# Altium PCB Hierogram_V2.1.PcbDoc
Units mil, origin at the board's own origin, x right, y up, seen from the top; angles counter-clockwise.
Board outline 2850.39 x 3346.46 mil, 2 copper layers (Top Layer, Bottom Layer); 50 components, 102 nets, 230 pads, 32 vias.
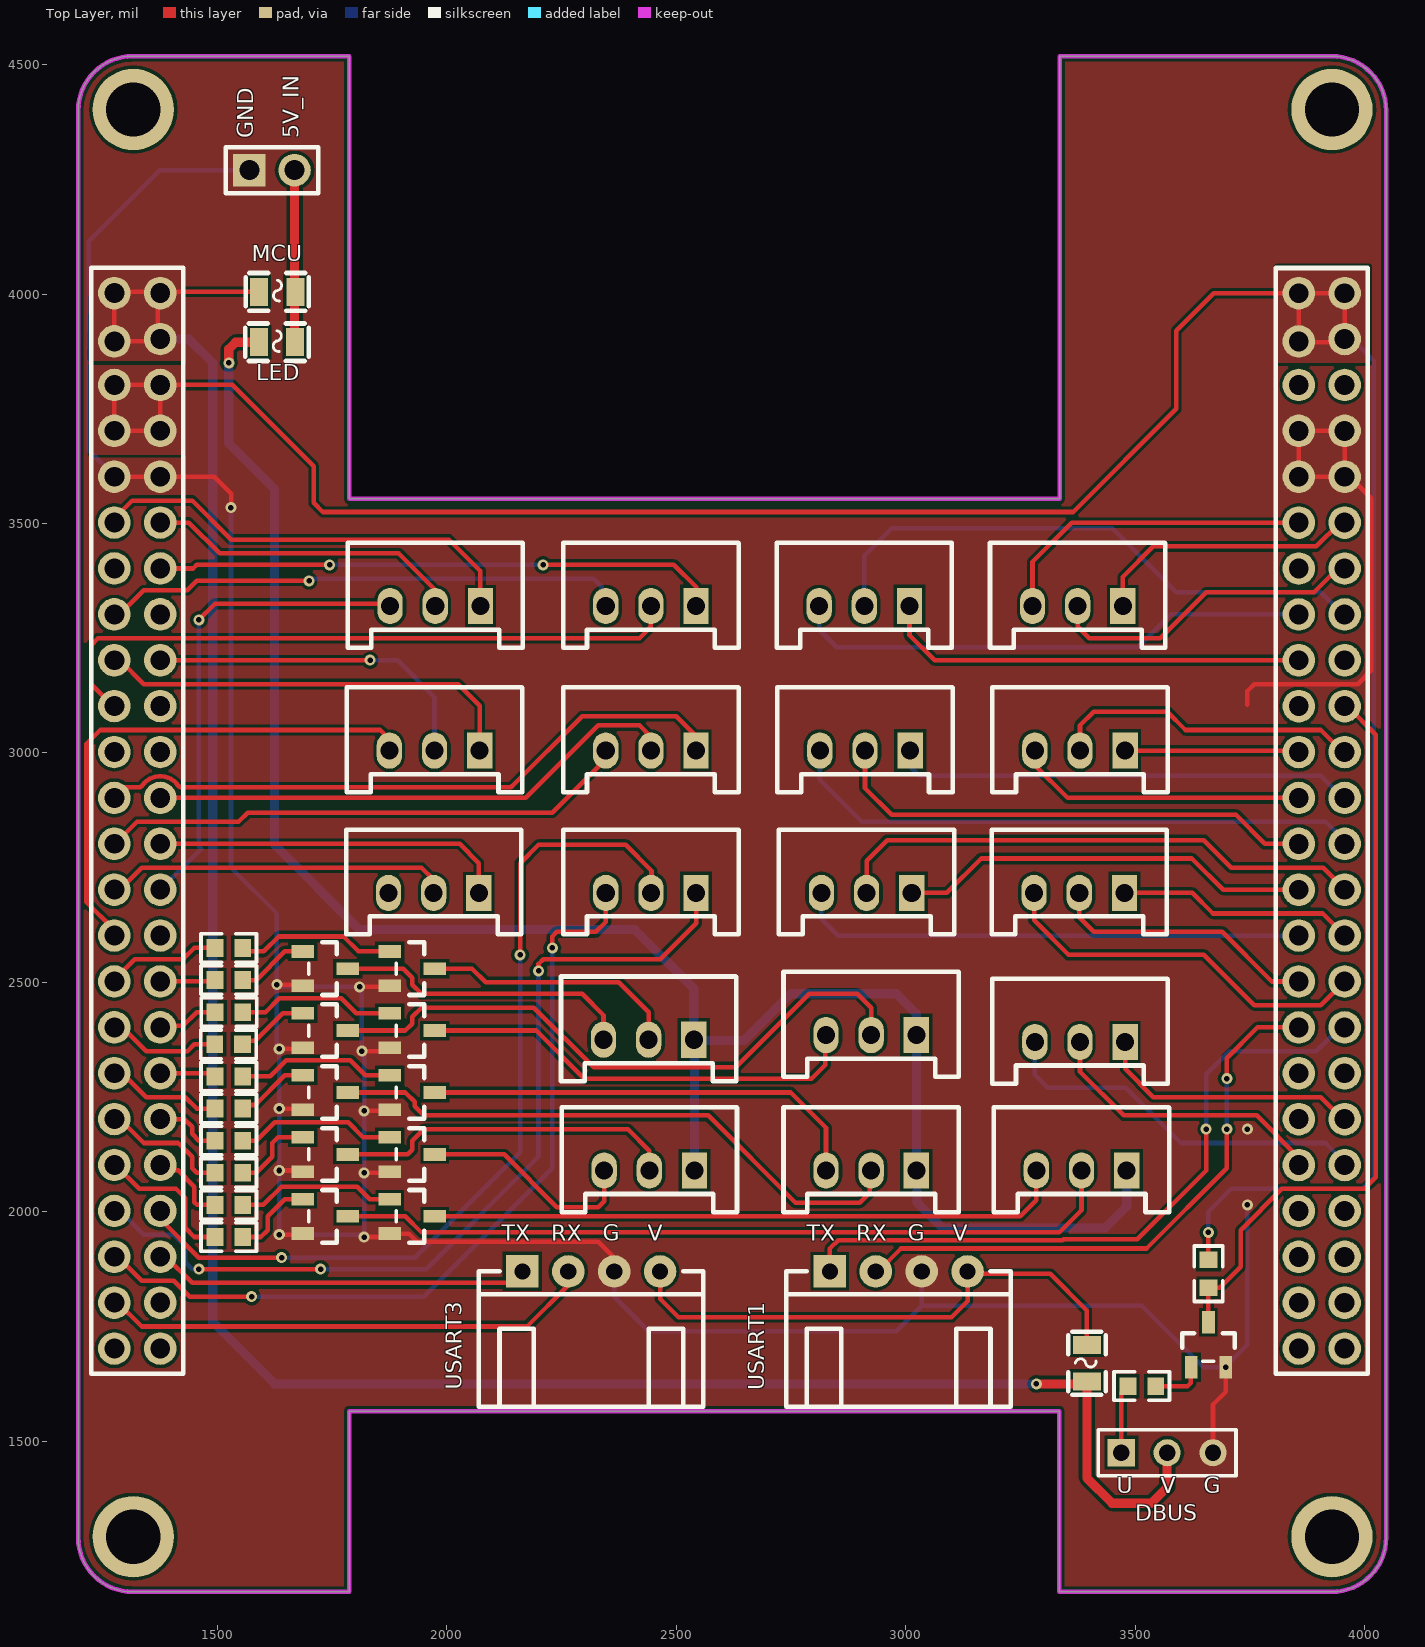
[diagram p0: Top Layer view]
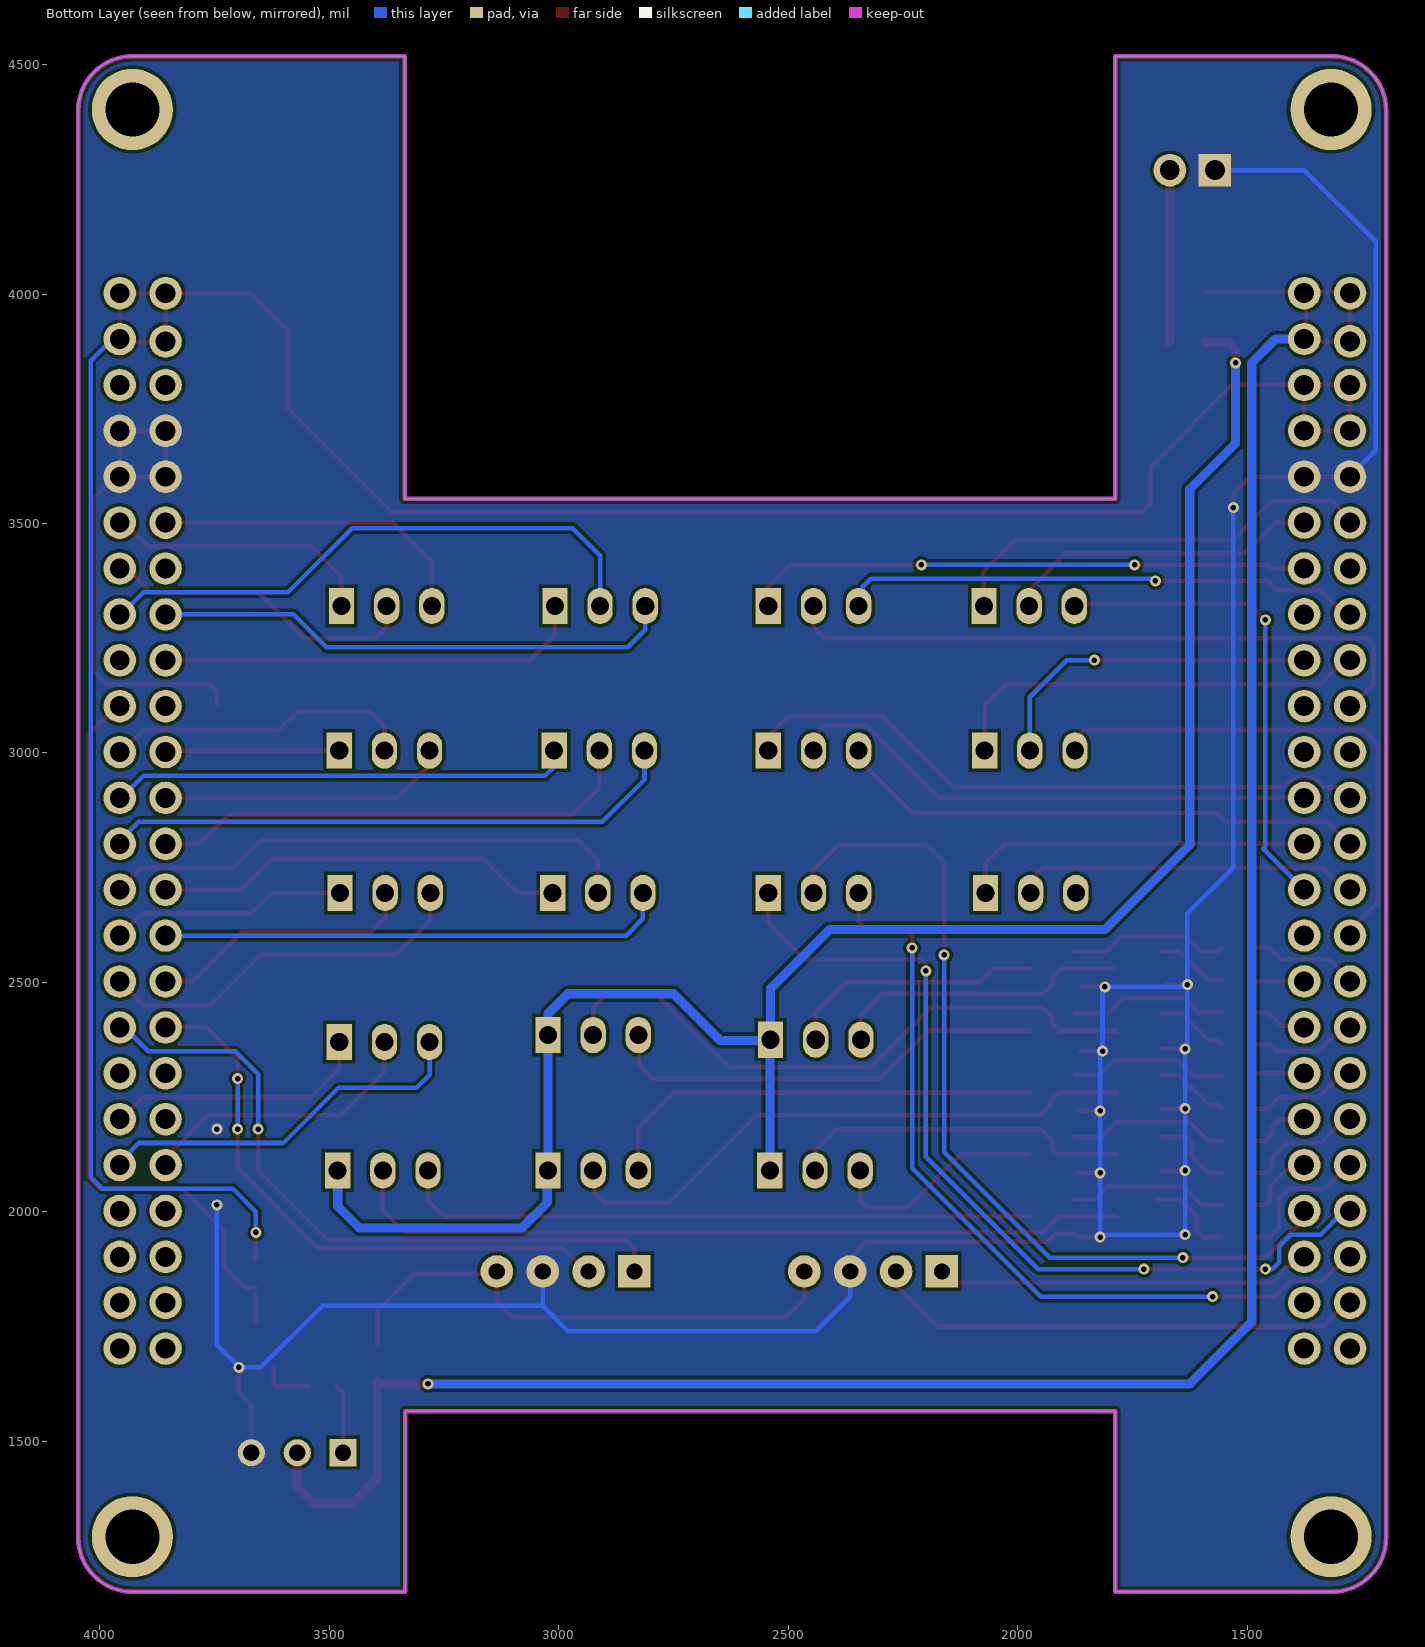
[diagram p1: Bottom Layer view, seen from below]
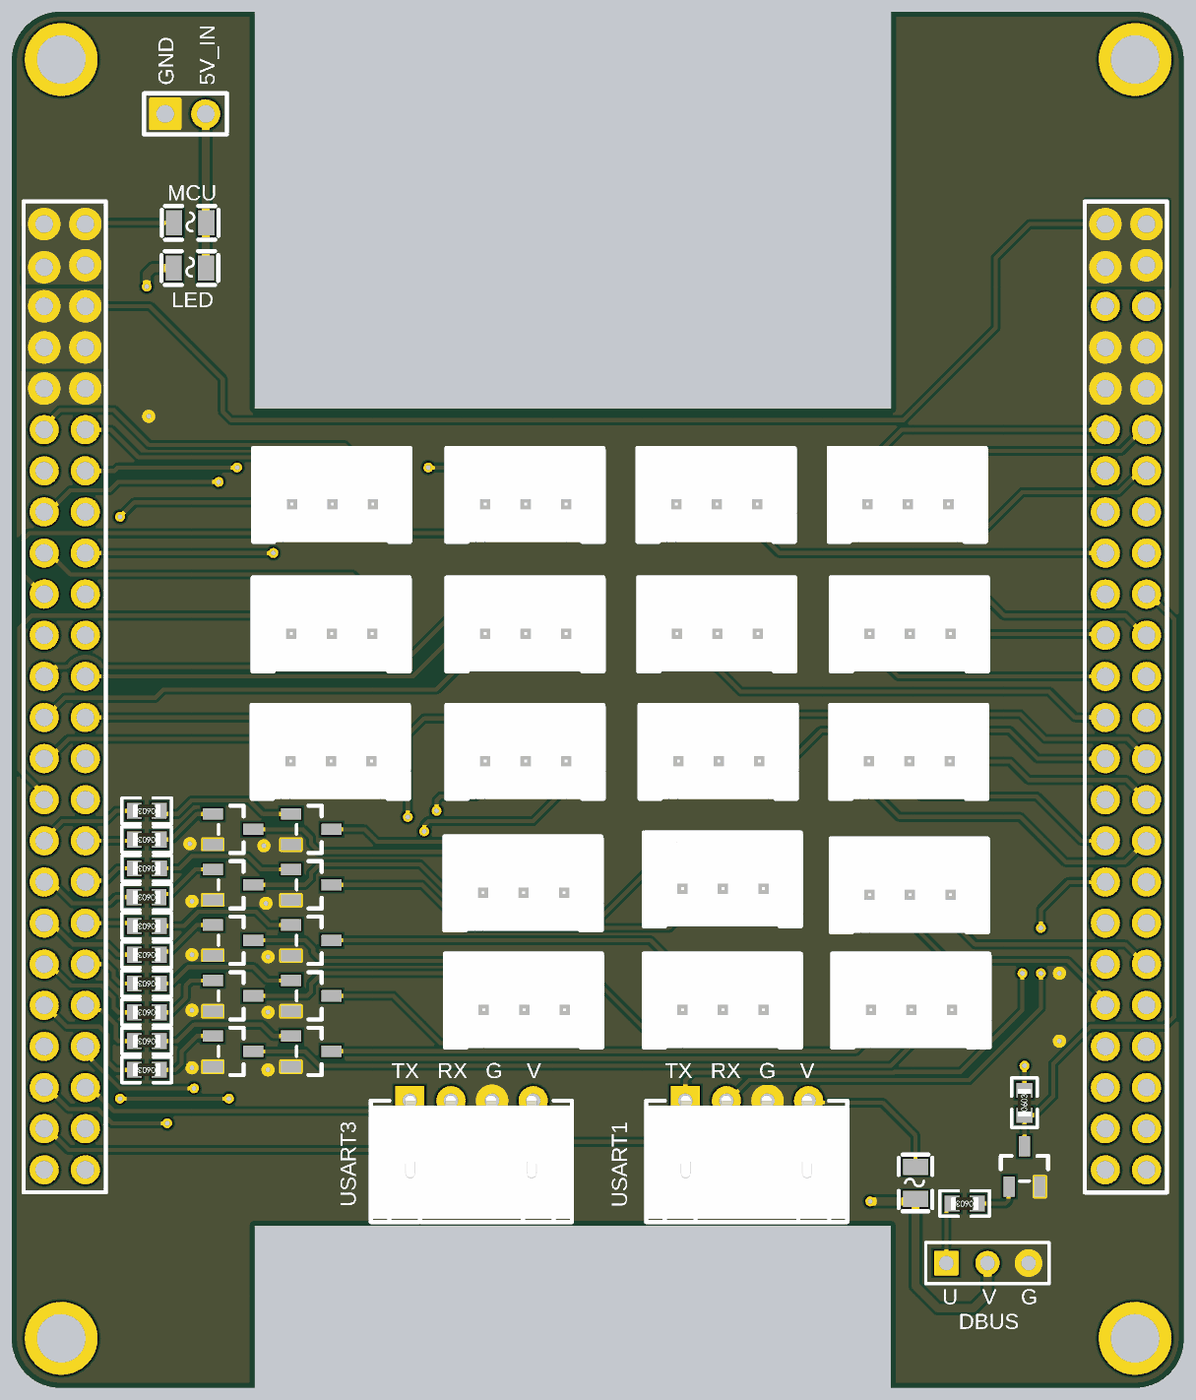
[diagram p2: 3D render of the assembled board from above, using the file's embedded part models]

## Layer stack, top to bottom
Top Solder: solder mask 0.4, Solder Resist, Dk 3.5
Top Layer: signal copper 1.4
Dielectric 1: dielectric 12.6, FR-4, Dk 4.8
Bottom Layer: signal copper 1.4
Bottom Solder: solder mask 0.4, Solder Resist, Dk 3.5

## Board outline
1196.89,1290 ccw(c1315,1290) 1315,1171.89 1787.44,1171.89 1787.44,1565.59 3334.69,1565.59 3334.69,1171.89 3929.17,1171.89 ccw(c3929.17,1290) 4047.28,1290 4047.28,4400.24 ccw(c3929.17,4400.24) 3929.17,4518.35 3336.02,4518.35 3336.02,3553.78 1787.44,3553.78 1787.44,4518.35 1315,4518.35 ccw(c1315,4400.24) 1196.89,4400.24

## Design rules (kind name [scope] priority, off if disabled: settings)
Clearance [All] p1: gap=7 ignorepadtopadclearanceinfootprint=TRUE
HoleSize [All] p1: absolutevalues=TRUE maxlimit=500 minlimit=1 maxpercent=80.000 minpercent=20.000
MinimumSolderMaskSliver [All] p1: minsoldermaskwidth=0
PlaneConnect [All] p1: planeconnectstyle=Direct reliefexpansion=20 reliefentries=4 reliefconductorwidth=10 reliefairgap=10
PolygonConnect [All] p1: connectstyle=Direct reliefconductorwidth=10 reliefentries=4 polygonreliefangle="90 Angle" airgapwidth=10
RoutingVias [All] p1: holewidth=12 width=25 viastyle="Through Hole" minholewidth=12 minwidth=20 maxholewidth=28 maxwidth=50
SilkToSilkClearance [All] p1: silktosilkclearance=0
SilkToSolderMaskClearance [IsPad] p1: minsilkscreentomaskgap=0 clearancetoexposedcopper=TRUE
SolderMaskExpansion [All] p1: expansion=4 istentingtop=FALSE
Width [All] p1: maxlimit=100 minlimit=10 preferedwidth=10
25 further rules are at their usual default settings.

## Classes and differential pairs
component class Hierogram_V2.1: USART1 USART3

## Components (designator, comment, footprint, x,y, rotation, side; value= is the part's Value field where it differs from the comment)
F1 "自恢复 1A/0805" "1A 0805" 1630.63,4005 r180 top
F2 "自恢复 1A/0850" "1A 0805" 3395,1670 r270 top
F3 "自恢复 1A/0805" "1A 0805" 1630,3895 r180 top
J1 "XH2.54 3P_1" XH2.54_3P立式 3375,3320 r180 top
J1_LEFT "24*2PIN" 24*2PIN_D 1275.63,4002 r0 top
J2 "XH2.54 3P_1" XH2.54_3P立式 1975,3320 r180 top
J2_RIGHT "24*2PIN" 24*2PIN_D 3856.89,4001.89 r0 top
J3 "XH2.54 3P_1" XH2.54_3P立式 2445,3320 r180 top
J4 "XH2.54 3P_1" XH2.54_3P立式 1973.43,3005 r180 top
J5 "XH2.54 3P_1" XH2.54_3P立式 2910,3320 r180 top
J6 "XH2.54 3P_1" XH2.54_3P立式 2445,3005 r180 top
J7 "XH2.54 3P_1" XH2.54_3P立式 1971.57,2695 r180 top
J8 "XH2.54 3P_1" XH2.54_3P立式 2440,2375 r180 top
J9 "XH2.54 3P_1" XH2.54_3P立式 2925,2385 r180 top
J10 "XH2.54 3P_1" XH2.54_3P立式 2925,2090 r180 top
J11 "XH2.54 3P_1" XH2.54_3P立式 2441.57,2090 r180 top
J12 "XH2.54 3P_1" XH2.54_3P立式 3383.43,2090 r180 top
J13 "XH2.54 3P_1" XH2.54_3P立式 3380,3005 r180 top
J14 "XH2.54 3P_1" XH2.54_3P立式 2911.57,3005 r180 top
J15 "XH2.54 3P_1" XH2.54_3P立式 2915,2695 r180 top
J16 "XH2.54 3P_1" XH2.54_3P立式 3378.43,2695 r180 top
J18 "XH2.54 3P_1" XH2.54_3P立式 3380,2370 r180 top
J19 "XH2.54 3P_1" XH2.54_3P立式 2445,2695 r180 top
P1 "2PIN" 2PIN 1570,4270 r0 top
P2 "Header 3" HDR1X3 3470,1475 r0 top
Q1 "2N5551S-RTK/P" 2N5551 3660,1710 r270 top
Q2 "2N5551S-RTK/P" 2N5551 1925,2530 r180 top
Q3 "2N5551S-RTK/P" 2N5551 1735,2530 r180 top
Q4 "2N5551S-RTK/P" 2N5551 1735,2395 r180 top
Q5 "2N5551S-RTK/P" 2N5551 1925,2395 r180 top
Q6 "2N5551S-RTK/P" 2N5551 1735,2260 r180 top
Q7 "2N5551S-RTK/P" 2N5551 1925,2260 r180 top
Q8 "2N5551S-RTK/P" 2N5551 1735,2125 r180 top
Q9 "2N5551S-RTK/P" 2N5551 1925,2125 r180 top
Q10 "2N5551S-RTK/P" 2N5551 1735,1990 r180 top
Q11 "2N5551S-RTK/P" 2N5551 1925,1990 r180 top
R1 "4.7KΩ/0603/1%" 0603_R 3660,1865 r90 top
R2 "4.7KΩ/0603/1%" 0603_R 3514.69,1620 r180 top
R3 "100Ω (1000) ±1%" 0603_R 1525,2575 r180 top
R4 "100Ω (1000) ±1%" 0603_R 1525,2505 r180 top
R5 "100Ω (1000) ±1%" 0603_R 1524.69,2365 r180 top
R6 "100Ω (1000) ±1%" 0603_R 1525.32,2435 r180 top
R7 "100Ω (1000) ±1%" 0603_R 1525,2225 r180 top
R8 "100Ω (1000) ±1%" 0603_R 1525,2295 r180 top
R11 "100Ω (1000) ±1%" 0603_R 1525,2085 r180 top
R12 "100Ω (1000) ±1%" 0603_R 1525,2155 r180 top
R13 "100Ω (1000) ±1%" 0603_R 1525,1945 r180 top
R14 "100Ω (1000) ±1%" 0603_R 1525,2015 r180 top
USART1 "XH2.54 4P" XH2.54_4P卧式(短边) 2985,1870 r0 top
USART3 "XH2.54 4P" XH2.54_4P卧式(短边) 2315,1870 r0 top

## Footprints (in the part's own frame and the unit in brackets; to place one, negate y for a bottom-side part, rotate by r counter-clockwise, add the part's x,y. Pads: shape width x height; smd on the part's side, far side on the other; paste and mask are expansions set on the pad)
"1A 0805" [mm]
  rect 1x1.55 smd: 1(-1,0) 2(1,0)
  silkscreen extent -1.75,-1.04 1.75,1.04
2N5551 [mm]
  rect 1.25x0.7 smd: 1(1.25,0.95) 2(1.25,-0.95) 3(-1.25,0)
  silkscreen extent -0.65,-1.46 0.9,1.46
2PIN [mm]
  rect 1.8x1.8 hole 1.1: 1(0,0)
  round 1.8 hole 1.1: 2(2.5,0)
  silkscreen extent -1.31,-1.27 3.81,1.27
24*2PIN_D [mm]
  round 1.8 hole 1.1: 1(0,0) 2(0,-2.667) 3(0,-5.08) 4(0,-7.62) 5(0,-10.16) 6(0,-12.7) 7(0,-15.24) 8(0,-17.78) 9(0,-20.32) 10(0,-22.86) 11(0,-25.4) 12(0,-27.94) 13(0,-30.48) 14(0,-33.02) 15(0,-35.56) 16(0,-38.1) 17(0,-40.64) 18(0,-43.18) 19(0,-45.72) 20(0,-48.26) 21(0,-50.8) 22(0,-53.34) 23(0,-55.88) 24(0,-58.42) 25(2.54,-58.42) 26(2.54,-55.88) 27(2.54,-53.34) 28(2.54,-50.8) 29(2.54,-48.26) 30(2.54,-45.72) 31(2.54,-43.18) 32(2.54,-40.64) 33(2.54,-38.1) 34(2.54,-35.56) 35(2.54,-33.02) 36(2.54,-30.48) 37(2.54,-27.94) 38(2.54,-25.4) 39(2.54,-22.86) 40(2.54,-20.32) 41(2.54,-17.78) 42(2.54,-15.24) 43(2.54,-12.7) 44(2.54,-10.16) 45(2.54,-7.62) 46(2.54,-5.08) 47(2.54,-2.54) 48(2.54,0)
  silkscreen extent -1.27,-59.82 3.81,1.4
0603_R [mm]
  rect 0.93x0.98 smd: 1(-0.77,0) 2(0.77,0)
  silkscreen extent -1.53,-0.79 1.54,0.79, body extent -0.85,-0.4 0.85,0.4, height 0.56
HDR1X3 [mm] "Connector; Header; 3 Position"
  rect 1.5x1.5 hole 0.9: 1(0,0)
  round 1.5 hole 0.9: 2(2.54,0) 3(5.08,0)
  silkscreen extent -1.27,-1.27 6.35,1.27
XH2.54_3P立式 [mm]
  rect 1.4x2 hole 1: 1(-2.5,0)
  oval 1.4x2 hole 1: 2(0,0) 3(2.5,0)
  silkscreen extent -4.85,-3.5 4.85,2.3, body extent -4.99,-3.42 4.91,2.33, height 7
XH2.54_4P卧式(短边) [mm]
  rect 1.8x1.8 hole 0.9: 1(-3.81,0)
  round 1.8 hole 0.9: 2(-1.27,0) 3(1.27,0) 4(3.81,0)
  silkscreen extent -6.22,-7.49 6.2,0, body extent -6.29,-7.31 6.21,0.33, height 5.95

## Part data
F1 F2 F3: library part ASMD1206-100, BOM_Manufacturer=JDTFUSE, BOM_Manufacturer Part=ASMD1206-100, BOM_Supplier=LCSC, BOM_Supplier Part=C135340, Contributor=LCSC, spicePre=F, spiceSymbolName=ASMD1206-100
J1 J2 J3 J4 J5 J6 J7 J8 J9 J10 J11 J12 J13 J14 J15 J16 J18 J19: "立式"
J1_LEFT J2_RIGHT: library part 24*2PIN_D
P2: "Header, 3-Pin", LatestRevisionDate=17-Jul-2002, LatestRevisionNote="Re-released for DXP Platform.", Publisher="Altium Limited"
Q1 Q2 Q3 Q4 Q5 Q6 Q7 Q8 Q9 Q10 Q11: BOM_LCSC Assembly=Yes, BOM_Manufacturer=KEC, BOM_Manufacturer Part=2N5551S-RTK/P, BOM_Supplier=LCSC, BOM_Supplier Part=C112669, Contributor=LCSC, SMT Type=Extend, spicePre=Q, spiceSymbolName=2N5551S-RTK/P
R1 R2: library part "0603 4.7KΩ (4701) 1%", "贴片电阻", Package=0603, SuppliersPartNumber=C23162, ComponentLink1Description=供应商链接, ComponentLink1URL=http://www.szlcsc.com/product/details_23889.html, Supplier=LC
R3 R4 R5 R6 R7 R8 R11 R12 R13 R14: library part "0603 100Ω (1000) 1%", "贴片电阻", Package=0603, SuppliersPartNumber=C22775, ComponentLink1Description=供应商链接, ComponentLink1URL=http://www.szlcsc.com/product/details_23502.html, Supplier=LC
USART1 USART3: "卧式短边"

## Free pads (board coordinates)
  round 177.17 hole 118.11: 19(1316.97,1291.97) 19(1316.97,4402.2) 19(3929.17,1291.97) 19(3929.17,4402.2)

## Via types
v1: diameter 24, hole 12, Top Layer to Bottom Layer, 32 vias

## Nets (pads, with @x,y where several pads share a name; then routed paths per layer and width w, separated by ;. In a path a pad name is that pad's centre, name@x,y a point inside that pad or via, vN(x,y) a via of type N, cw(c..) or ccw(c..) an arc to the next point about the centre after c; other vN are vias at no path point)
3.3V: J1_LEFT.3 J1_LEFT.4 J1_LEFT.45 J1_LEFT.46 J2_RIGHT.1 J2_RIGHT.2 J2_RIGHT.47 J2_RIGHT.48 R1.2 | length 6119.7
  Top Layer w10: R1.2 v1(3660,1955) ; J1_LEFT.46 1533,3802 1710,3625 1710,3545 1730,3525 3365,3525 3590,3750 3590,3920 3671.89,4001.89 J2_RIGHT.1 ; J1_LEFT.46 J1_LEFT.3 J1_LEFT.4 1275.63,3700.63 1277,3702 J1_LEFT.45 J1_LEFT.46 ; J2_RIGHT.1 J2_RIGHT.48 J2_RIGHT.47 3950,3895 3850,3895 3856.89,3901.89 J2_RIGHT.1
  Bottom Layer w10: v1(3660,1955) 3660,2000 3710,2050 3995,2050 4020,2075 4020,3855 3973.11,3901.89 J2_RIGHT.47
5V: F1.2 F2.2 J1_LEFT.1 J1_LEFT.2 J1_LEFT.47 J1_LEFT.48 P2.2 | length 5311
  Top Layer w10: J1_LEFT.48 1370.63,3997 1370.63,3897 J1_LEFT.2 J1_LEFT.1 1278.63,4005 F1.2
  Top Layer w20: v1(3285,1625) 3389.37,1625 F2.2 3395,1420 3450,1365 3535,1365 3570,1400 P2.2
  Bottom Layer w20: J1_LEFT.47 1438,3902 1490,3850 1490,1760 1625,1625 v1(3285,1625)
5V_IN: F1.1 F3.1 P1.2 | length 377.2
  Top Layer w20: P1.2 1668.42,3896.57 1670,3895 F3.1@1670,3896.57
5V_LED: F3.2 J8.1 J9.1 J10.1 J11.1 J12.1 | length 4166.6
  Top Layer w20: v1(1525,3850) 1525,3880 1540,3895 F3.2
  Bottom Layer w20: v1(1525,3850) 1525,3675 1625,3575 1625,2800 1810,2615 2410,2615 2538.43,2486.57 J8.1 J8.1@2540,2373.43 ; J11.1 J8.1@2540,2373.43 ; J12.1 3481.85,2011.85 3435,1965 3080,1965 3025,2020 3025,2088.43 J10.1 J9.1 3023.43,2431.57 2980,2475 2750,2475 2648.43,2373.43 J8.1@2540,2373.43
5V_USART: F2.1 USART1.4 USART3.4 | length 1225.2
  Top Layer w10: USART3.4 2465,1810 2505,1770 3100,1770 3135,1805 USART1.4 3135,1890 3160,1865 3315,1865 3395,1785 F2.1
GND: J1_LEFT.5 J1_LEFT.44 J2_RIGHT.4 J2_RIGHT.5 J2_RIGHT.44 J2_RIGHT.45 P1.1 P2.3 Q1.1 Q2.1 Q3.1 Q4.1 Q5.1 Q6.1 Q7.1 Q8.1 Q9.1 Q10.1 Q11.1 USART1.3 USART3.3 | length 8163
  Top Layer w10: J1_LEFT.5 J1_LEFT.44 1493,3602 1530,3565 v1@1530,3535 ; v1(1630,2495) Q3.1@1680,2495 ; v1(1635,1950) Q10.1@1685,1950 ; v1(1635,2090) Q8.1@1685,2090 ; v1(1635,2225) Q6.1@1685,2225 ; v1(1635,2355) Q4.1@1685,2355 ; v1(1810,2490) Q2.1@1860,2490 ; v1(1815,2350) Q5.1@1865,2350 ; v1(1820,1945) Q11.1@1870,1945 ; v1(1820,2085) Q9.1@1870,2085 ; v1(1820,2220) Q7.1@1870,2220 ; Q11.1 1917.4,1952.6 1935,1935 2330,1935 2365,1900 USART3.3 ; P2.3 3670,1580 3697.4,1607.4 v1(3697.4,1660.8) ; 3745,3105 3745,3135 3760,3150 3985,3150 4015,3180 4015,3555 3968.11,3601.89 J2_RIGHT.44 ; J2_RIGHT.4@3850,3705 3856.89,3698.11 J2_RIGHT.5 J2_RIGHT.44 ; J2_RIGHT.4 J2_RIGHT.45 J2_RIGHT.44
  Bottom Layer w10: J1_LEFT.5@1275,3595 1275,3605 1220,3660 1220,4115 1375,4270 P1.1 ; v1(1529.85,3534.44) 1529.85,2750.15 1630,2650 v1(1630,2495) ; USART3.3 2365,1815 2440,1740 2980,1740 3035,1795 ; USART1.3 3035,1795 ; v1(3745,2015) 3745,1710 3695.8,1660.8 3649.2,1660.8 3515,1795 3035,1795 ; v1(1630,2495) 1635,2490 v1(1810,2490) 1815,2485 v1(1815,2350) 1820,2345 v1(1820,2220) v1(1820,2085) v1(1820,1945) 1815,1950 v1(1635,1950) v1(1635,2090) v1(1635,2225) v1(1635,2355) 1630,2360 v1(1630,2495)
  other v1: 3745,2180
NetJ8_2: J8.2 Q2.3 | length 565.2
  Top Layer w10: Q2.3 2055,2530 2085,2500 2375,2500 2440,2435 J8.2
NetJ8_3: J8.3 Q3.3 | length 655.9
  Top Layer w10: Q3.3@1790,2530 1905,2530 1925,2510 1925,2495 1945,2475 2295,2475 2341.57,2428.43 J8.3
NetJ9_2: J9.2 Q4.3 | length 1362.8
  Top Layer w10: Q4.3 1910,2395 1925,2410 1925,2425 1945,2445 2190,2445 2320,2315 2630,2315 2790,2475 2895,2475 2925,2445 J9.2
NetJ9_3: J9.3 Q5.3 | length 972.4
  Top Layer w10: Q5.3 2195,2395 2300,2290 2710,2290 2795,2290 2825,2320 2825,2383.43 J9.3
NetJ10_2: J10.2 Q6.3 | length 1301.4
  Top Layer w10: Q6.3 1910,2260 1930,2240 1930,2230 1950,2210 2570,2210 2760,2020 2900,2020 2921.5,2041.5 2921.5,2086.5 J10.2
NetJ10_3: J10.3 Q7.3 | length 977.5
  Top Layer w10: Q7.3 2750,2260 2826.57,2183.43 J10.3
NetJ11_2: J11.2 Q8.3 | length 763
  Top Layer w10: Q8.3 1915,2125 1925,2135 1925,2155 1950,2180 2395,2180 2441.57,2133.43 J11.2@2441.57,2081.57
NetJ11_3: J11.3 Q9.3 | length 488.9
  Top Layer w10: Q9.3 2125,2125 2240,2010 2330,2010 2343.15,2023.15 J11.3
NetJ12_2: J12.2 Q10.3 | length 1720.4
  Top Layer w10: Q10.3 1910,1990 1945,1955 3335,1955 3383.43,2003.43 J12.2
NetJ12_3: J12.3 Q11.3 | length 1388.6
  Top Layer w10: Q11.3 1974.46,1990.26 3250.26,1990.26 3285,2025 J12.3@3285,2088.27
NetP2_1: P2.1 R2.2 | length 151
  Top Layer w10: P2.1 3470,1605.63 R2.2
NetQ1_2: Q1.2 R2.1 | length 113.6
  Top Layer w10: R2.1 3614.34,1620 3621.22,1626.88 3621.22,1659.42 Q1.2
NetQ2_2: Q2.2 R3.1 | length 350.6
  Top Layer w10: R3.1 1562.91,2567.4 1601.26,2567.4 1633.86,2600 1775,2600 1807.6,2567.4 Q2.2
NetQ3_2: Q3.2 R4.1 | length 156.3
  Top Layer w10: R4.1 1585,2505 1647.4,2567.4 Q3.2
NetQ4_2: Q4.2 R5.1 | length 158.7
  Top Layer w10: R5.1 1562.45,2372.45 1582.45,2372.45 1642.4,2432.4 Q4.2
NetQ5_2: Q5.2 R6.1 | length 346.1
  Top Layer w10: R6.1 1605,2435 1635,2465 1770,2465 1802.6,2432.4 Q5.2
NetQ6_2: Q6.2 R7.1 | length 160.5
  Top Layer w10: R7.1 1563.08,2232.76 1582.76,2232.76 1647.4,2297.4 Q6.2
NetQ7_2: Q7.2 R8.1 | length 348.5
  Top Layer w10: R8.1 1615,2295 1650,2330 1790,2330 1822.6,2297.4 Q7.2
NetQ8_2: Q8.2 R11.1 | length 180.1
  Top Layer w10: R11.1 1585,2085 1620,2120 1620,2150 1632.4,2162.4 Q8.2
NetQ9_2: Q9.2 R12.1 | length 350.6
  Top Layer w10: R12.1 1585,2155 1625,2195 1785,2195 1817.6,2162.4 Q9.2
NetQ10_2: Q10.2 R13.1 | length 192.2
  Top Layer w10: R13.1 1595,1945 1610,1960 1610,1990 1647.4,2027.4 Q10.2@1695.8,2027.4
NetQ11_2: Q11.2 R14.1 | length 348.5
  Top Layer w10: R14.1 1600,2015 1640,2055 1805,2055 1832.6,2027.4 Q11.2
PA0: J1_LEFT.12 J6.1 | length 1412.8
  Top Layer w10: J1_LEFT.12@1270,2900 1292.07,2922.07 cw(c1299.14,2915) 1299.14,2925 1328.62,2925 ccw(c1328.62,2935) 1336.81,2929.25 cw(c1375.63,2902) 1414.45,2929.26 ccw(c1422.64,2935) 1422.64,2925 2135.86,2925 ccw(c2135.86,2935) 2142.93,2927.93 2295,3080 2500,3080 2543.43,3036.57 J6.1
PA1: J1_LEFT.37 J6.2 | length 1175.2
  Top Layer w10: J1_LEFT.37 2172,2902 2330,3060 2420,3060 2445,3035 J6.2
PA2: J1_LEFT.13 J6.3 | length 1165.8
  Top Layer w10: J1_LEFT.13 1277,2802 1325,2850 1546.25,2850 1566.25,2870 2230,2870 2346.57,2986.57 J6.3
PA3: J1_LEFT.36 J7.1 | length 776.8
  Top Layer w10: J1_LEFT.36 2028,2802 2070,2760 J7.1
PA4: J1_LEFT.14 J7.2 | length 755.3
  Top Layer w10: J1_LEFT.14 1287,2702 1335,2750 1945,2750 1971.57,2723.43 J7.2
PA5: J1_LEFT.35 J2.3 | length 1065.2
  Top Layer w10: v1(1460,3290) 1495,3325 J2.3@1876.57,3325
  Bottom Layer w10: J1_LEFT.35 1465,2791.37 1460,2796.37 v1(1460,3290) ; J2.3@1871.57,3325 J2.3
PA6: J1_LEFT.15 J4.3 | length 1148.8
  Top Layer w10: J1_LEFT.15 1275.63,2614.37 1215,2675 1215,3020 1245,3050 1855,3050 1875,3030 J4.3
PA7: J1_LEFT.34
PA8: J2_RIGHT.18
PA9(USART1_TX): J2_RIGHT.32 USART1.1 | length 1494.5
  Top Layer w10: USART1.1 2835,1920 2853,1938 3342.04,1938 3344.04,1940 3505,1940 3655,2090 v1(3655,2180)
  Bottom Layer w10: v1(3655,2180) 3655,2300 3705,2350 3895,2350 3946.89,2401.89 J2_RIGHT.32
PA10(USART1_RX): J2_RIGHT.17 USART1.2 | length 1282.8
  Top Layer w10: USART1.2 2940,1870 2990,1920 3525,1920 3700,2095 v1(3700,2180) ; v1(3700,2290) 3700,2335 3766.89,2401.89 J2_RIGHT.17
  Bottom Layer w10: v1(3700,2180) v1(3700,2290)
PA11: J2_RIGHT.33 J16.3 | length 835
  Top Layer w10: J16.3 3280,2635 3355,2560 3650,2560 3760,2450 3905,2450 J2_RIGHT.33
PA12: J2_RIGHT.16 J16.2 | length 589.7
  Top Layer w10: J16.2 3378.43,2641.57 3410,2610 3690,2610 3798.11,2501.89 J2_RIGHT.16
PA15: J2_RIGHT.34 J16.1 | length 518.6
  Top Layer w10: J16.1 3625,2695 3670,2650 3908.78,2650 J2_RIGHT.34
PB0: J1_LEFT.17 R5.2 | length 246.5
  Top Layer w10: J1_LEFT.17 1293,2402 1345,2350 1435,2350 1450,2365 R5.2
PB1: J1_LEFT.32 R6.2 | length 122.4
  Top Layer w10: J1_LEFT.32@1385,2405 1425,2405 1455,2435 R6.2
PB3: J2_RIGHT.40
PB5: J2_RIGHT.9 J5.1 | length 934.5
  Top Layer w10: J5.1 3008.43,3256.57 3063.11,3201.89 J2_RIGHT.9
PB6: J2_RIGHT.41 J5.2 | length 1259.7
  Bottom Layer w10: J5.2 2910,3430 2970,3490 3450,3490 3590,3350 3905,3350 3953.11,3301.89 J2_RIGHT.41
PB7: J2_RIGHT.8 J5.3 | length 1142.6
  Bottom Layer w10: J5.3 2811.57,3268.43 2850,3230 3506.22,3230 3578.11,3301.89 J2_RIGHT.8
PB8: J1.2 J2_RIGHT.42 | length 700.2
  Top Layer w10: J1.2 3375,3275 3400,3250 3555,3250 3655,3350 3890,3350 3941.89,3401.89 J2_RIGHT.42
PB9: J2_RIGHT.7
PB10(USART3_TX): J1_LEFT.27 USART3.1 | length 823.3
  Top Layer w10: J1_LEFT.27 1388,1902 1445,1845 2140,1845 USART3.1
PB11(USART3_RX): J1_LEFT.23 USART3.2 | length 1078.2
  Top Layer w10: J1_LEFT.23 1283,1802 1335,1750 2175,1750 2265,1840 USART3.2
PB12: J1_LEFT.26
PB13: J1_LEFT.24
PB14: J1_LEFT.25
PB15: J2_RIGHT.25
PC0: J1_LEFT.9 J4.1 | length 935.3
  Top Layer w10: J1_LEFT.9 1288,3202 1340,3150 2025,3150 2071.85,3103.15 J4.1
PC1: J1_LEFT.40 J4.2 | length 747.7
  Top Layer w10: J1_LEFT.40 v1(1833,3202)
  Bottom Layer w10: v1(1833,3202) 1893,3202 1973.43,3121.57 J4.2
PC2: J1_LEFT.10 J3.2 | length 1437.1
  Top Layer w10: J1_LEFT.10 1273,3102 1225,3150 1225,3235 1240,3250 2420,3250 2445,3275 J3.2
PC3: J1_LEFT.39
PC4: J1_LEFT.16 R3.2 | length 251.4
  Top Layer w10: J1_LEFT.16 1275.63,2505.63 1320,2550 1425,2550 1450,2575 R3.2
PC5: J1_LEFT.33 R4.2 | length 116.1
  Top Layer w10: J1_LEFT.33 R4.2@1491.69,2502
PC6: J2_RIGHT.20 J18.2 | length 635.5
  Top Layer w10: J18.2 3380,2305 3475,2210 3765,2210 3856.89,2118.11 J2_RIGHT.20
PC7: J2_RIGHT.30 J18.1 | length 582.3
  Top Layer w10: J18.1 3478.43,2311.57 3540,2250 3905,2250 3953.11,2201.89 J2_RIGHT.30
PC8: J2_RIGHT.19
PC9: J2_RIGHT.31
PC10: J2_RIGHT.15 J15.3 | length 1112
  Bottom Layer w10: J15.3 2816.57,2638.43 2853.11,2601.89 J2_RIGHT.15
PC11: J2_RIGHT.35 J15.2 | length 1176
  Top Layer w10: J15.2 2915,2765 2960,2810 3650,2810 3710,2750 3910,2750 3956.89,2703.11 J2_RIGHT.35
PC12: J2_RIGHT.14 J15.1 | length 902.7
  Top Layer w10: J15.1 3090,2695 3165,2770 3623.78,2770 3691.89,2701.89 J2_RIGHT.14
PC13: J1_LEFT.41
PD0: J2_RIGHT.36 J14.3 | length 1268.5
  Bottom Layer w10: J14.3 2813.15,2941.85 2905,2850 3915,2850 3956.89,2808.11 J2_RIGHT.36
PD1: J2_RIGHT.13 J14.2 | length 1077.2
  Top Layer w10: J14.2 2911.57,2923.43 2970,2865 3720,2865 3783.11,2801.89 J2_RIGHT.13
PD2: J2_RIGHT.37 J14.1 | length 1010.1
  Bottom Layer w10: J14.1 3010,2970 3030,2950 3905,2950 3953.11,2901.89 J2_RIGHT.37
PD3: J2_RIGHT.12 J13.3 | length 636.5
  Top Layer w10: J13.3 3281.57,2973.43 3353.11,2901.89 J2_RIGHT.12
PD4: J2_RIGHT.38 J13.2 | length 680.8
  Top Layer w10: J13.2 3380,3060 3410,3090 3570,3090 3610,3050 3905,3050 3953.11,3001.89 J2_RIGHT.38
PD5: J2_RIGHT.11 J13.1 | length 375.4
  Top Layer w10: J13.1 J2_RIGHT.11@3853.78,3005
PD6(USART2_RX): J2_RIGHT.39 Q1.3 R1.1 | length 1631
  Top Layer w10: Q1.3 R1.1@3660,1820 ; R1.1 3684.69,1834.69 3730,1880 3730,1960 3820,2050 4000,2050 4025,2075 4025,3040 3963.11,3101.89 J2_RIGHT.39
PD7: J2_RIGHT.10
PD8: J2_RIGHT.24
PD9: J2_RIGHT.26
PD10: J2_RIGHT.23
PD11: J2_RIGHT.27
PD12: J2_RIGHT.22
PD13: J2_RIGHT.28
PD14: J2_RIGHT.21
PD15: J2_RIGHT.29 J18.3 | length 831.9
  Bottom Layer w10: J18.3 3281.57,2298.43 3310,2270 3480,2270 3600,2150 3915,2150 3956.89,2108.11 J2_RIGHT.29
PE0: J1.1 J2_RIGHT.43 | length 596
  Top Layer w10: J1.1 3473.43,3383.43 3540,3450 3895,3450 3946.89,3501.89 J2_RIGHT.43
PE1: J1.3 J2_RIGHT.6 | length 712.2
  Top Layer w10: J1.3 3276.57,3416.57 3361.89,3501.89 J2_RIGHT.6
PE2: J1_LEFT.6 J2.1 | length 962.9
  Top Layer w10: J1_LEFT.6 1275.63,3510.63 1315,3550 1445,3550 1530,3465 2005,3465 2073.43,3396.57 J2.1
PE3: J1_LEFT.43 J2.2 | length 695.3
  Top Layer w10: J1_LEFT.43 1438,3502 1505,3435 1895,3435 1975,3355 J2.2
PE4: J1_LEFT.7
PE5: J1_LEFT.42 J3.1 | length 1232.7
  Top Layer w10: J1_LEFT.42 1447,3402 1455,3410 v1(1745,3410) ; v1(2210,3410) 2495,3410 2543.43,3361.57 J3.1
  Bottom Layer w10: v1(1745,3410) v1(2210,3410)
PE6: J1_LEFT.8 J3.3 | length 1147.7
  Top Layer w10: J1_LEFT.8 1287,3302 1339.57,3354.57 1434.57,3354.57 1455,3375 v1(1700,3375)
  Bottom Layer w10: v1(1700,3375) 1703.79,3375 1708.79,3380 2320,3380 2337.94,3362.06 2337.94,3328.63 J3.3
PE7: J1_LEFT.18 R7.2 | length 251
  Top Layer w10: J1_LEFT.18 1293,2302 1345,2250 1430,2250 1455,2225 R7.2
PE8: J1_LEFT.31 R8.2 | length 122
  Top Layer w10: J1_LEFT.31 1487.68,2302 R8.2
PE9: J1_LEFT.19 R11.2 | length 282.2
  Top Layer w10: J1_LEFT.19 1288,2202 1340,2150 1415,2150 1445,2120 1445,2095 1455,2085 R11.2
PE10: J1_LEFT.30 R12.2 | length 147.3
  Top Layer w10: J1_LEFT.30 1428,2202 1445,2185 1445,2170 1460,2155 R12.2
PE11: J1_LEFT.20 R13.2 | length 322.2
  Top Layer w10: J1_LEFT.20 1278,2102 1330,2050 1410,2050 1430,2030 1430,1965 1450,1945 R13.2
PE12: J1_LEFT.29 R14.2 | length 175.1
  Top Layer w10: J1_LEFT.29 1387.28,2090.36 1414.64,2090.36 1450,2055 1450,2020.86 1455.86,2015 R14.2
PE13: J1_LEFT.21 J19.1 | length 1965.6
  Top Layer w10: v1(1460,1875) v1(1725,1875) ; v1(2200,2525) 2200,2540 2210,2550 2465,2550 2543.43,2628.43 J19.1
  Bottom Layer w10: J1_LEFT.21 1288,2002 1340,1950 1405,1950 1430,1925 1430,1890 1445,1875 v1(1460,1875) ; v1(1725,1875) 1955,1875 2200,2120 v1(2200,2525)
PE14: J1_LEFT.28 J19.2 | length 1927.4
  Top Layer w10: J1_LEFT.28 1375.63,1984.37 1460,1900 v1(1640,1900) ; v1(2160,2560) 2160,2759.71 2200,2799.71 2390,2799.71 2446.2,2743.51 J19.2@2446.2,2702.27
  Bottom Layer w10: v1(1640,1900) 1930,1900 2160,2130 v1@2160,2558.23
PE15: J1_LEFT.22 J19.3 | length 1804.5
  Top Layer w10: J1_LEFT.22 1283,1902 1335,1850 1405,1850 1440,1815 v1(1575,1815) ; v1(2230,2575) 2230,2600 2240,2610 2325,2610 2346.57,2631.57 J19.3
  Bottom Layer w10: v1(1575,1815) 1950,1815 2230,2095 v1(2230,2575)
pads on no net: J1_LEFT.11 J1_LEFT.38 J2_RIGHT.3 J2_RIGHT.46 J7.3

## Polygon pours and split planes (outlines as drawn)
GND on Bottom Layer "GND_L02_P000" (solid, remove dead copper, pour order 0): 1787.44,4518.35 1787.44,3553.78 3336.02,3553.78 3336.02,4518.35 4001.65,4518.35 4055,4465 4045,4455 4045,1220 3990,1165 3980,1175 3335,1175 3334.69,1175.31 3334.69,1565.59 1787.44,1565.59 1787.44,1171.89 1785.55,1170 1205,1170 1190,1185 1195,1190 1195,4495 1220,4520
3.3V on Top Layer "3.3V_L01_P004" (solid, remove dead copper, pour order 4): 3810,4060 4010,4060 4010,3850 3810,3850
3.3V on Top Layer "3.3V_L01_P003" (solid, remove dead copper, pour order 3): 1225,3845 1425,3845 1425,3650 1225,3650
5V on Top Layer "5V_L01_P002" (solid, remove dead copper, pour order 2): 1228.21,4055 1423.21,4055 1423.21,3855 1223.08,3855
GND on Top Layer "GND_L01_P001" (solid, remove dead copper, pour order 1): 1789.79,4518.89 1789.79,3554.32 3338.38,3554.32 3338.38,4518.89 4004.01,4518.89 4047.35,4518.89 4047.35,4455.54 4047.35,1220.54 4047.35,1175.54 3982.35,1175.54 3337.35,1175.54 3337.04,1566.13 1789.79,1566.13 1789.79,1172.43 1787.9,1170.54 1207.35,1170.54 1192.35,1185.54 1197.35,1190.54 1197.35,4495.54 1222.35,4520.54

## Keep-outs
Keep-Out Layer:
  the board outline again, w10

## Silkscreen, mask and mechanical layers (free items; w line width, h text height)
Top Overlay:
  text "GND" at 1590,4340 h60 r90
  text "5V_IN" at 1690,4340 h60 r90
  text "MCU" at 1575,4060 h60
  text "LED" at 1585,3800 h60
  text "TX   RX   G    V" at 2120,1925 h60
  text "TX   RX   G    V" at 2785,1925 h60
  text "U    V    G" at 3460,1375 h60
  text "DBUS" at 3500,1315 h60